# Altium PCB ServoBoard_342.PcbDoc
Units mm, origin at the board's own origin, x right, y up, seen from the top; angles counter-clockwise.
Board outline 152.4 x 101.6 mm, 2 copper layers (Top Layer, Bottom Layer); 21 components, 36 nets, 129 pads, 18 vias.
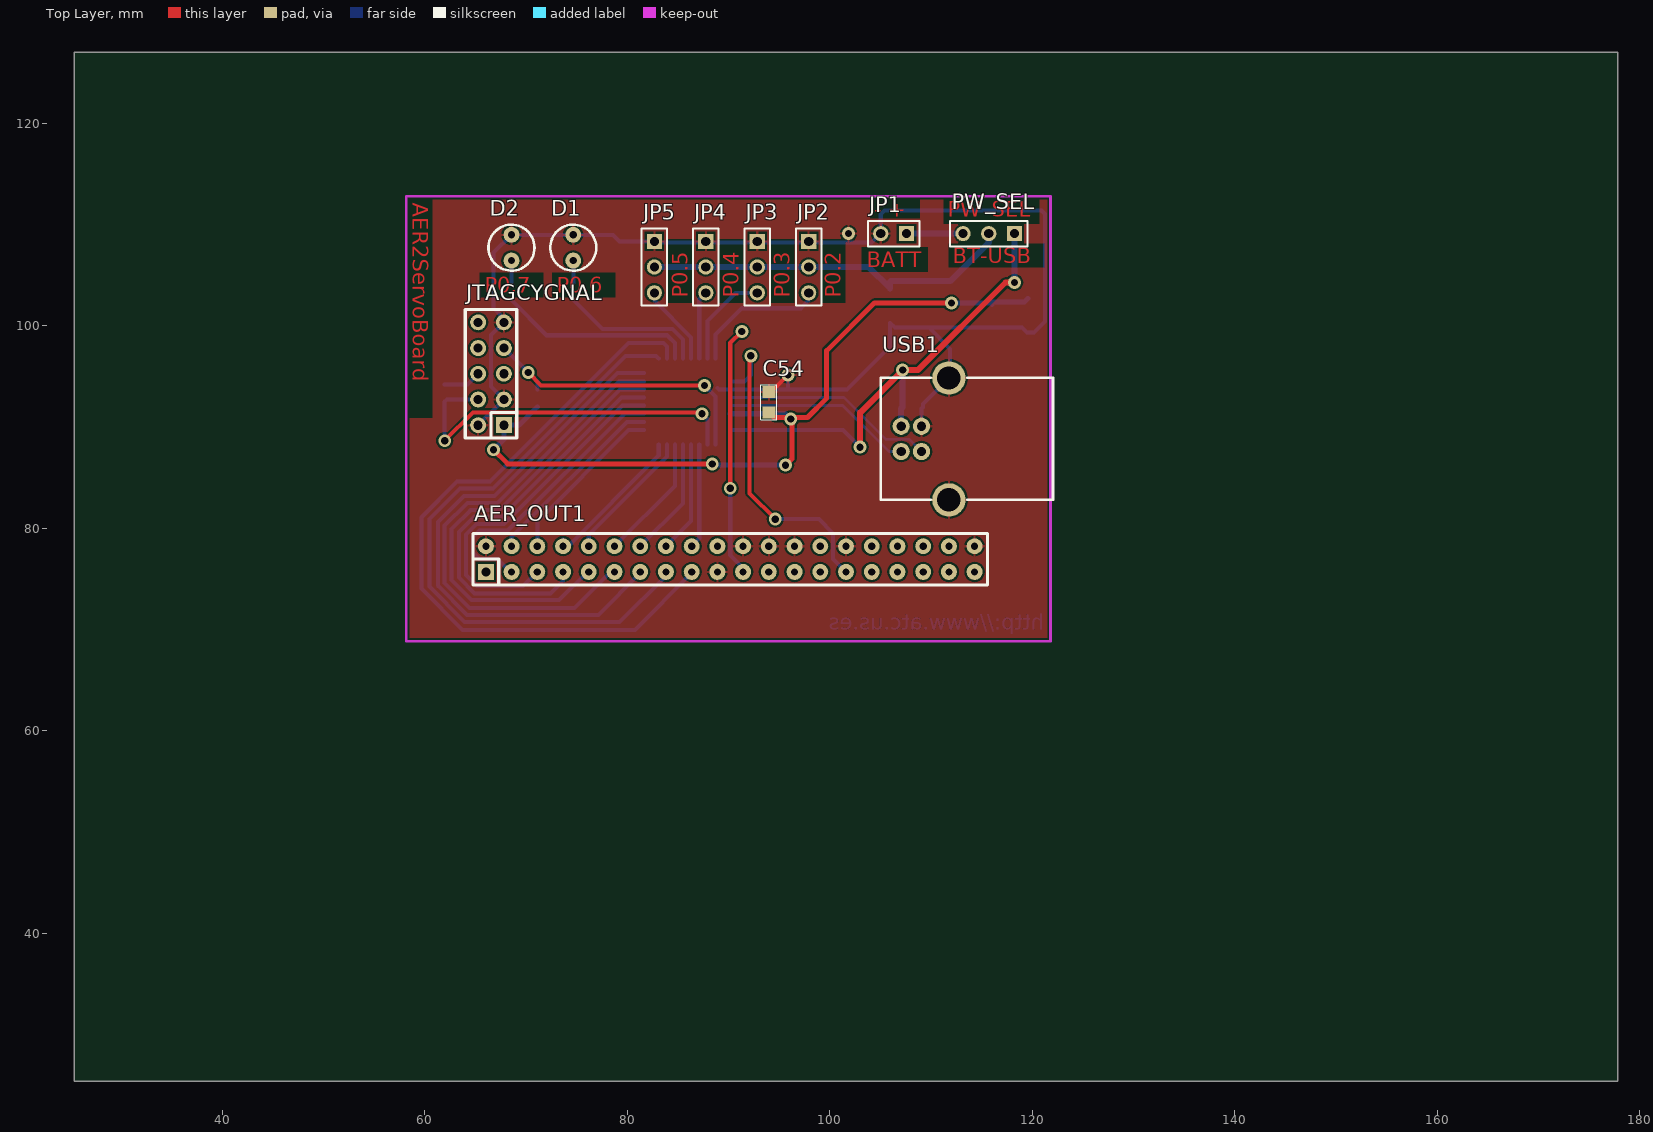
[diagram p0: Top Layer view]
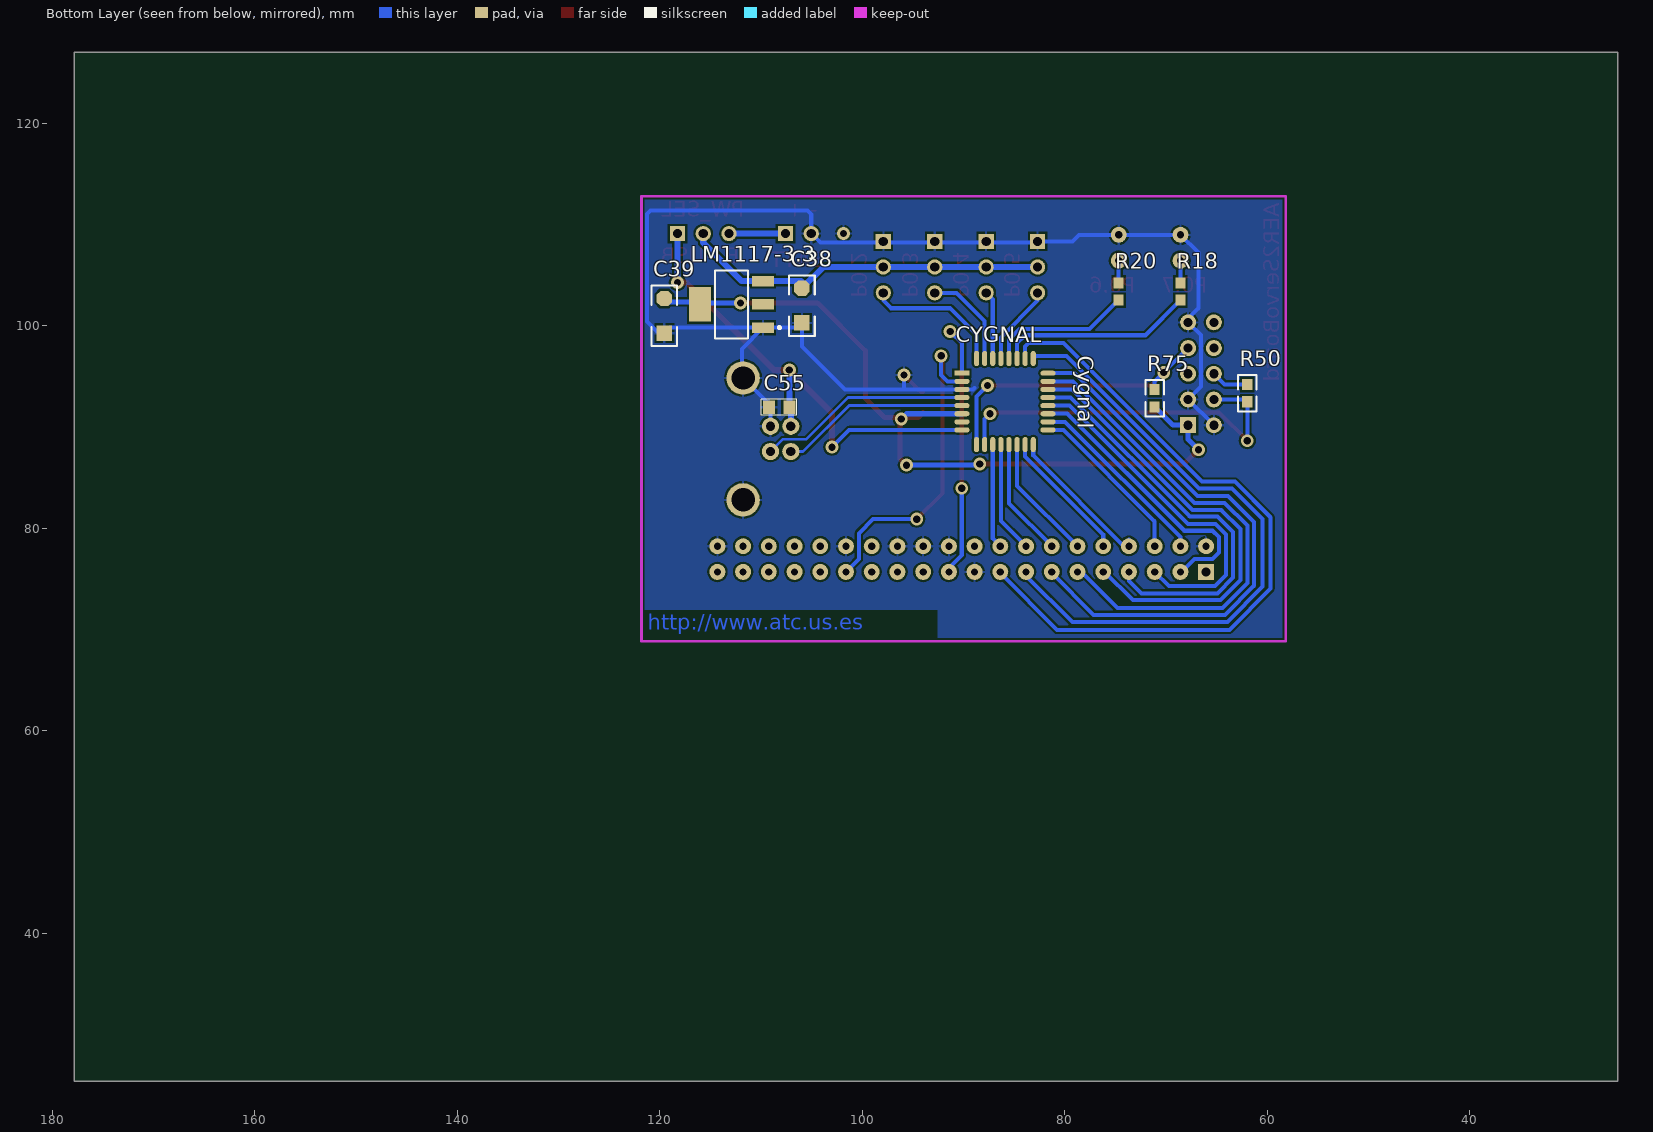
[diagram p1: Bottom Layer view, seen from below]

## Layer stack, top to bottom
Top Layer: signal copper 0.0356
Dielectric: dielectric 0.32, FR-4, Dk 4.8
Bottom Layer: signal copper 0.0356

## Board outline
25.4,25.4 177.8,25.4 177.8,127 25.4,127

## Design rules (kind name [scope] priority, off if disabled: settings)
Clearance [All] p1: gap=0.2
ComponentClearance [All] p1: gap=0.254 collisioncheckmode=3 verticalgap=0.254
PolygonConnect [All] p1: connectstyle=Relief reliefconductorwidth=0.254 reliefentries=4 polygonreliefangle="90 Angle"
RoutingVias [All] p1: holewidth=0.711 width=1.27 viastyle="Through Hole" minholewidth=0.711 minwidth=1.27 maxholewidth=0.711 maxwidth=1.27
SolderMaskExpansion [All] p1: expansion=0.102
TestPointUsage [All] p1: valid=0 allowmultiple=FALSE
Testpoint [All] p1: side=15 testpointundercomponent=TRUE minsize=1.016 maxsize=2.54 preferedsize=1.524 minholesize=0 maxholesize=1.016 preferedholesize=0.813 testpointgrid=0.025 style=1023 order=0-112345678
Width [All] p1: maxlimit=254 minlimit=0.254 preferedwidth=0.254
18 further rules are at their usual default settings.

## Components (designator, comment, footprint, x,y, rotation, side; value= is the part's Value field where it differs from the comment)
AER_OUT1 "*" IDC-40 66.04,75.692 r0 top
C38 "10 uF" Minitantalo 108.331,103.632 r0 bottom
C39 "10 uF" Minitantalo 121.92,102.616 r0 bottom
C54 "0.1 uF" "CAP 10" 93.98,92.456 r90 top
C55 "0.1 uF" "CAP 10" 108.204,91.948 r0 bottom
CYGNAL "*" LQFP-32 89.408,96.012 r270 bottom
D1 "" LED 74.676,106.426 r90 top
D2 "" LED 68.58,106.426 r90 top
JP1 "Header 2" HDR1X2 107.569,109.093 r180 top
JP2 "Header 3" HDR1X3 97.917,108.331 r270 top
JP3 "Header 3" HDR1X3 92.837,108.331 r270 top
JP4 "Header 3" HDR1X3 87.757,108.331 r270 top
JP5 "Header 3" HDR1X3 82.677,108.331 r270 top
JTAGCYGNAL "" IDC-10 67.818,90.17 r90 top
LM1117-3.3 "LM1117" DSO-G3/D6.7 112.903,102.108 r90 bottom
PW_SEL "Header 3" HDR1X3 118.237,109.093 r180 top
R18 "220" 1608[0603] 68.58,103.378 r90 bottom
R20 "220" 1608[0603] 74.676,103.378 r90 bottom
R50 "Res3" C1608-0603 61.976,93.345 r270 bottom
R75 "1K" C1608-0603 71.12,92.837 r270 bottom
USB1 "" USB_CON 111.76,82.804 r90 top

## Footprints (in the part's own frame and the unit in brackets; to place one, negate y for a bottom-side part, rotate by r counter-clockwise, add the part's x,y. Pads: shape width x height; smd on the part's side, far side on the other; paste and mask are expansions set on the pad)
1608[0603] [mm] "Chip Capacitor; Body 1.6 x 0.8 mm (LxW typ)"
  rect 1.1x1 smd: 1(-0.85,0) 2(0.85,0)
C1608-0603 [mm]
  rect 1.1x1 smd: 1(-0.85,0) 2(0.85,0)
  silkscreen extent -1.8,-0.9 1.8,0.9
"CAP 10" [mm]
  rect 1.2x1.3 smd: 1(-1.01,-0.004) 2(0.99,-0.004)
  silkscreen extent -1.76,-0.8 1.74,0.8
DSO-G3/D6.7 [mm]
  rect 1.05x2.15 smd: 1(-2.3,-3.1) 2(0,-3.1) 3(2.3,-3.1)
  rect 3.4x2.15 smd: 4(0,3.1)
  silkscreen extent -3.35,-4.85 3.35,1.63
HDR1X2 [mm] "Connector; Header; 2 Position"
  rect 1.5x1.5 hole 0.9: 1(0,0)
  round 1.5 hole 0.9: 2(2.54,0)
  silkscreen extent -1.27,-1.27 3.81,1.27
HDR1X3 [mm] "Connector; Header; 3 Position"
  rect 1.5x1.5 hole 0.9: 1(0,0)
  round 1.5 hole 0.9: 2(2.54,0) 3(5.08,0)
  silkscreen extent -1.27,-1.27 6.35,1.27
IDC-10 [mil]
  rect 62x62 hole 35.43: 1(0.27,0.06)
  round 62 hole 35.43: 2(0.27,100.06) 3(100.27,0.06) 4(100.27,100.06) 5(200.27,0.06) 6(200.27,100.06) 7(300.27,0.06) 8(300.27,100.06) 9(400.27,0.06) 10(400.27,100.06)
  silkscreen extent -50,-50 450,150
IDC-40 [mil]
  rect 62x62 hole 36: 1(0.04,-0.11)
  round 62 hole 28: 2(0.04,99.89) 3(100.04,-0.11) 4(100.04,99.89) 5(200.04,-0.11) 6(200.04,99.89) 7(300.04,-0.11) 8(300.04,99.89) 9(400.04,-0.11) 10(400.04,99.89) 11(500.04,-0.11) 12(500.04,99.89) 13(600.04,-0.11) 14(600.04,99.89) 15(700.04,-0.11) 16(700.04,99.89) 17(800.04,-0.11) 18(800.04,99.89) 19(900.04,-0.11) 20(900.04,99.89) 21(1000.04,-0.11) 22(1000.04,99.89) 23(1100.04,-0.11) 24(1100.04,99.89) 25(1200.04,-0.11) 26(1200.04,99.89) 27(1300.04,-0.11) 28(1300.04,99.89) 29(1400.04,-0.11) 30(1400.04,99.89) 31(1500.04,-0.11) 32(1500.04,99.89) 33(1600.04,-0.11) 34(1600.04,99.89) 35(1700.04,-0.11) 36(1700.04,99.89) 37(1800.04,-0.11) 38(1800.04,99.89) 39(1900.04,-0.11) 40(1900.04,99.89)
  silkscreen extent -50,-50 1950,150
LED [mil]
  round 62 hole 28: A(0.43,0.44) K(100.43,0.44)
  silkscreen extent -39,-89 140,90
LQFP-32 [mm]
  rect 0.5x1.5 smd: 1(0.7,-0.75)
  oval 0.5x1.5 smd: 2(1.5,-0.75) 3(2.3,-0.75) 4(3.1,-0.75) 5(3.9,-0.75) 6(4.7,-0.75) 7(5.5,-0.75) 8(6.3,-0.75) 17(6.3,7.75) 18(5.5,7.75) 19(4.7,7.75) 20(3.9,7.75) 21(3.1,7.75) 22(2.3,7.75) 23(1.5,7.75) 24(0.7,7.75)
  oval 1.5x0.5 smd: 9(7.75,0.7) 10(7.75,1.5) 11(7.75,2.3) 12(7.75,3.1) 13(7.75,3.9) 14(7.75,4.7) 15(7.75,5.5) 16(7.75,6.3) 25(-0.75,6.3) 26(-0.75,5.5) 27(-0.75,4.7) 28(-0.75,3.9) 29(-0.75,3.1) 30(-0.75,2.3) 31(-0.75,1.5) 32(-0.75,0.7)
Minitantalo [mil]
  oct 60x60 smd: 1(-93.54,-2.83)
  rect 60x60 smd: 2(-93.54,132.17)
  silkscreen extent -144,-53 -44,182
USB_CON [mm]
  round 1.7 hole 0.92: 1(7.27,4.71) 2(4.77,4.71) 3(4.77,2.71) 4(7.27,2.71)
  round 3.3 hole 2.3: 5(0,0) 6(12.04,0)
  silkscreen extent 0,-10.28 12.04,6.72

## Part data
AER_OUT1: library part CON_AER1
C38 C39: library part "CAPACITOR POL", "Capacitor"
C54 C55: library part CAP, "Capacitor"
CYGNAL: library part C8051F320
D1 D2: library part LED
JP1: "Header, 2-Pin"
JP2 JP3 JP4 JP5 PW_SEL: "Header, 3-Pin"
JTAGCYGNAL: library part CON10, "Connector"
R18 R20 R75: library part RES1
R50: "Resistor"
USB1: library part CON6, "Connector"

## Via types
v1: diameter 1.27, hole 0.711, Top Layer to Bottom Layer, 18 vias

## Nets (pads, with @x,y where several pads share a name; then routed paths per layer and width w, separated by ;. In a path a pad name is that pad's centre, name@x,y a point inside that pad or via, vN(x,y) a via of type N, cw(c..) or ccw(c..) an arc to the next point about the centre after c; other vN are vias at no path point)
ACK_A: AER_OUT1.29 CYGNAL.2 | length 32.1
  Top Layer w0.4: v1(92.202,97.028) 92.075,96.901 92.075,83.439 v1(94.615,80.899)
  Bottom Layer w0.4: CYGNAL.2 91.591,94.512 92.202,95.123 v1(92.202,97.028) ; v1(94.615,80.899) 98.933,80.899 100.33,79.502 100.33,76.96 AER_OUT1.29
AER_A0: AER_OUT1.17 CYGNAL.26 | length 70.5
  Bottom Layer w0.4: CYGNAL.26 83.908,97.956 83.566,98.298 80.137,98.298 66.44,84.601 63.201,84.601 59.69,81.09 59.69,74.041 63.754,69.977 80.772,69.977 86.361,75.566 AER_OUT1.17
AER_A1: AER_OUT1.15 CYGNAL.25 | length 63.2
  Bottom Layer w0.4: CYGNAL.25 82.842,97.028 79.831,97.028 66.75,83.947 63.5,83.947 60.452,80.899 60.452,74.231 63.944,70.739 79.248,70.739 83.821,75.312 AER_OUT1.15
AER_A2: AER_OUT1.13 CYGNAL.24 | length 55.7
  Bottom Layer w0.4: AER_OUT1.13 81.281,75.566 77.16,71.445 64.191,71.445 61.309,74.327 61.309,80.613 63.869,83.173 66.901,83.173 79.039,95.312 CYGNAL.24
AER_A3: AER_OUT1.11 CYGNAL.23 | length 50.5
  Bottom Layer w0.4: AER_OUT1.11 78.356,75.689 74.803,72.136 64.429,72.136 61.976,74.589 61.976,80.264 64.23,82.518 67.171,82.518 79.164,94.512 CYGNAL.23
AER_A4: AER_OUT1.9 CYGNAL.22 | length 45.3
  Bottom Layer w0.4: AER_OUT1.9 76.07,75.689 73.279,72.898 64.643,72.898 62.651,74.89 62.651,79.923 64.548,81.82 67.397,81.82 79.289,93.712 CYGNAL.22
AER_A5: AER_OUT1.7 CYGNAL.21 | length 40.6
  Bottom Layer w0.4: AER_OUT1.7 73.661,74.804 72.422,73.565 64.929,73.565 63.373,75.12 63.373,79.629 64.897,81.153 67.655,81.153 79.414,92.912 CYGNAL.21
AER_A6: AER_OUT1.5 CYGNAL.20 | length 34.9
  Bottom Layer w0.4: AER_OUT1.5 69.727,74.295 65.151,74.295 64.072,75.374 64.072,79.375 65.106,80.41 67.837,80.41 79.539,92.112 CYGNAL.20
AER_A7: AER_OUT1.3 CYGNAL.19 | length 28.3
  Bottom Layer w0.4: AER_OUT1.3@68.834,75.692 68.453,75.692 67.183,76.962 65.405,76.962 64.77,77.597 64.77,79.121 65.405,79.756 68.199,79.756 79.755,91.312 CYGNAL.19
AER_A8: AER_OUT1.4 CYGNAL.18 | length 18.7
  Bottom Layer w0.4: AER_OUT1.4 68.581,79.122 79.971,90.512 CYGNAL.18
AER_A9: AER_OUT1.6 CYGNAL.17 | length 16.7
  Bottom Layer w0.4: AER_OUT1.6 71.121,80.694 80.139,89.712 CYGNAL.17
AER_A10: AER_OUT1.8 CYGNAL.16 | length 15.1
  Bottom Layer w0.4: AER_OUT1.8@73.661,78.868 AER_OUT1.8 73.912,77.978 73.914,77.978 83.108,87.172 CYGNAL.16
AER_A11: AER_OUT1.10 CYGNAL.15 | length 13.2
  Bottom Layer w0.4: AER_OUT1.10 76.201,79.376 83.908,87.083 CYGNAL.15
AER_A12: AER_OUT1.12 CYGNAL.14 | length 12.5
  Bottom Layer w0.4: AER_OUT1.12 84.708,84.196 CYGNAL.14
AER_A13: AER_OUT1.14 CYGNAL.13 | length 11.8
  Bottom Layer w0.4: AER_OUT1.14 85.508,82.456 CYGNAL.13
AER_A14: AER_OUT1.16 CYGNAL.12 | length 11.1
  Bottom Layer w0.4: AER_OUT1.16@83.821,78.233 86.308,80.72 CYGNAL.12
AER_A15: AER_OUT1.18 CYGNAL.11 | length 10.3
  Bottom Layer w0.4: AER_OUT1.18 87.108,78.976 CYGNAL.11
GND: AER_OUT1.2 AER_OUT1.19 AER_OUT1.22 AER_OUT1.24 AER_OUT1.26 AER_OUT1.30 AER_OUT1.40 C38.2 C39.2 C54.2 C55.2 CYGNAL.3 D1.K D2.K JP1.2 JP2.1 JP3.1 JP4.1 JP5.1 JTAGCYGNAL.2 JTAGCYGNAL.3 JTAGCYGNAL.9 LM1117-3.3.1 USB1.4 USB1.5 USB1.6 | length 141.4
  Top Layer w0.4: C54.2 94.208,93.446 v1(95.885,95.123)
  Bottom Layer w0.4: JTAGCYGNAL.2 JTAGCYGNAL.3 67.811,92.717 66.548,93.98 66.548,99.068 JTAGCYGNAL.9@67.717,100.237 ; JTAGCYGNAL.9 JTAGCYGNAL.9@67.717,100.237 ; 88.9,93.853 89.041,93.712 101.713,93.712 105.955,97.954 C38.2 106.422,99.808 118.995,99.808 119.489,99.314 120.142,99.314 121.266,100.438 121.266,111.017 120.904,111.379 105.41,111.379 105.029,110.998 JP1.2 104.14,108.204 82.804,108.204 JP5.1 79.248,108.331 78.602,108.977 D2.K 66.802,107.21 66.802,101.727 67.717,100.812 JTAGCYGNAL.9@67.717,100.237 ; 95.885,93.712 v1(95.885,95.123) ; USB1.4 109.05,91.808 C55.2 109.194,92.278 111.658,94.742 111.887,94.971 111.887,97.724 LM1117-3.3.1
  other v1: 101.854,109.093
LED0: CYGNAL.28 R20.1 | length 14.3
  Bottom Layer w0.4: R20.1 77.544,99.66 84.49,99.66 85.508,98.642 CYGNAL.28
LED1: CYGNAL.27 R18.1 | length 19.4
  Bottom Layer w0.4: R18.1 72.048,99.06 83.947,99.06 84.708,98.299 CYGNAL.27
NetCYGNAL_4: CYGNAL.4 USB1.3 | length 21.3
  Bottom Layer w0.254: CYGNAL.4 101.398,92.912 105.537,88.773 107.851,88.773 USB1.3
  Bottom Layer w0.3: USB1.3 USB1.3@109.05,87.8
NetCYGNAL_5: CYGNAL.5 USB1.2 | length 18.8
  Bottom Layer w0.3: CYGNAL.5 101.309,92.112 105.847,87.574 USB1.2
NetCYGNAL_9: CYGNAL.9 JTAGCYGNAL.7 R75.1 | length 29.7
  Top Layer w0.4: v1(70.231,95.377) 71.501,94.107 v1(87.63,94.107)
  Bottom Layer w0.4: JTAGCYGNAL.7 71.12,94.493 R75.1 ; v1(87.63,94.107) 88.708,93.029 CYGNAL.9
NetCYGNAL_10: CYGNAL.10 JTAGCYGNAL.4 R50.2 | length 37.4
  Top Layer w0.4: v1(61.976,88.646) 64.77,91.44 87.249,91.44 v1(87.376,91.313)
  Bottom Layer w0.4: v1(61.976,88.646) R50.2 62.198,92.717 JTAGCYGNAL.4 JTAGCYGNAL.4@65.055,92.495 ; v1(87.376,91.313) 87.908,90.781 CYGNAL.10
NetD1_A: D1.A R20.2 | length 2.2
  Bottom Layer w0.4: D1.A 74.676,106.426 R20.2
NetD2_A: D2.A R18.2 | length 2.2
  Bottom Layer w0.4: D2.A 68.58,106.426 R18.2
NetJTAGCYGNAL_6: JTAGCYGNAL.6 R50.1 | length 3.7
  Bottom Layer w0.4: R50.1 64.215,94.195 JTAGCYGNAL.6
REQ_A: AER_OUT1.21 CYGNAL.1 | length 29.4
  Top Layer w0.4: v1(90.17,83.947) 90.17,98.298 v1(91.313,99.441)
  Bottom Layer w0.4: CYGNAL.1 90.158,98.286 v1(91.313,99.441) ; v1(90.17,83.947) 90.17,77.343 91.441,76.072 AER_OUT1.21
SERVO0: CYGNAL.32 JP2.3 | length 13.7
  Bottom Layer w0.4: CYGNAL.32 88.708,99.122 91.313,101.727 97.155,101.727 97.917,102.489 JP2.3
SERVO1: CYGNAL.31 JP3.3 | length 9.8
  Bottom Layer w0.4: CYGNAL.31 87.908,100.481 90.678,103.251 JP3.3
SERVO2: CYGNAL.30 JP4.3 | length 6.8
  Bottom Layer w0.4: CYGNAL.30 87.108,102.602 JP4.3
SERVO3: CYGNAL.29 JP5.3 | length 8
  Bottom Layer w0.4: JP5.3 82.677,102.489 86.308,98.858 CYGNAL.29
VBAT: JP1.1 PW_SEL.3 | length 5.6
  Bottom Layer w0.6: JP1.1 PW_SEL.3
VCC: C38.1 JP2.2 JP3.2 JP4.2 JP5.2 LM1117-3.3.3 PW_SEL.2 | length 37
  Bottom Layer w0.6: JP5.2 103.868,105.791 C38.1 105.955,104.304 106.059,104.408 111.901,104.408 115.697,108.204 PW_SEL.2
VCC3: C39.1 C54.1 CYGNAL.6 JTAGCYGNAL.1 LM1117-3.3.4 R75.2 | length 80.9
  Top Layer w0.5: v1(66.802,87.757) 68.199,86.36 v1(88.392,86.36) ; C54.1 94.498,90.932 97.79,90.932 99.695,92.837 99.695,97.536 104.394,102.235 v1(112.014,102.235) ; v1(95.631,86.233) 96.266,86.868 v1@96.266,90.932
  Bottom Layer w0.5: v1(66.802,87.757) 67.816,88.771 JTAGCYGNAL.1 69.31,90.177 R75.2 ; v1(88.392,86.36) 88.519,86.233 v1(95.631,86.233) ; CYGNAL.6 95.624,91.312 v1(96.139,90.805) ; v1(112.014,102.235) 115.876,102.235 LM1117-3.3.4 ; LM1117-3.3.4@116.003,102.362 119.218,102.362 C39.1
VUSB: C55.1 CYGNAL.8 PW_SEL.1 USB1.1 | length 48
  Top Layer w0.6: v1(102.997,88.011) 102.997,91.428 v1(107.194,95.625) 108.706,95.625 117.348,104.267 v1(118.237,104.267)
  Bottom Layer w0.4: CYGNAL.8 101.296,89.712 v1(102.997,88.011)
  Bottom Layer w0.6: USB1.1 107.05,91.808 C55.1 v1(107.194,95.625) ; v1(118.237,104.267) PW_SEL.1
pads on no net: AER_OUT1.1 AER_OUT1.20 AER_OUT1.23 AER_OUT1.25 AER_OUT1.27 AER_OUT1.28 AER_OUT1.31 AER_OUT1.32 AER_OUT1.33 AER_OUT1.34 AER_OUT1.35 AER_OUT1.36 AER_OUT1.37 AER_OUT1.38 AER_OUT1.39 CYGNAL.7 JTAGCYGNAL.5 JTAGCYGNAL.8 JTAGCYGNAL.10 LM1117-3.3.2

## Polygon pours and split planes (outlines as drawn)
GND on Top Layer "Bottom Layer-No Net" (solid, remove dead copper, pour order 1000): 57.973,68.656 121.6,68.656 121.6,112.471 121.473,112.598 57.973,112.598 57.973,68.656
GND on Bottom Layer "Bottom Layer-No Net" (solid, remove dead copper, pour order 1001): 58.166,68.834 121.793,68.834 121.793,112.649 121.666,112.776 58.166,112.776 58.166,68.834

## Keep-outs
Keep-Out Layer:
  lines w0.254: 58.166,68.834 121.793,68.834 121.793,112.776 58.166,112.776 58.166,68.834

## Other copper
Top Layer:
  text "AER2ServoBoard" at 58.801,112.141 h1.52 r270
  text "- +" at 104.394,110.744 h1.52
  text "PW_SEL" at 111.633,110.744 h1.52
  text "BT-USB" at 112.141,106.172 h1.52
  text "BATT" at 103.632,105.791 h1.52
  text "P0.7" at 65.913,103.251 h1.52
  text "P0.6" at 73.025,103.251 h1.52
  text "P0.5" at 85.979,102.743 h1.52 r90
  text "P0.4" at 91.017,102.743 h1.52 r90
  text "P0.3" at 96.054,102.743 h1.52 r90
  text "P0.2" at 101.092,102.743 h1.52 r90
Bottom Layer:
  text "http://www.atc.us.es" at 121.158,69.977 h1.52

## Text inside footprints (layer, text, board x,y; h text height)
CYGNAL: Bottom Overlay "Cygnal" at 78.74,97.028 h1.52 r90